# Altium PCB PCB1.PcbDoc
Units mil, origin at the board's own origin, x right, y up, seen from the top; angles counter-clockwise.
Board outline 4500 x 2600 mil, 2 copper layers (Top Layer, Bottom Layer), stack 60.4 mil thick; 4 components, 2 nets, 8 pads, 0 vias.
Unrouted connection lines stored in the file: 6.
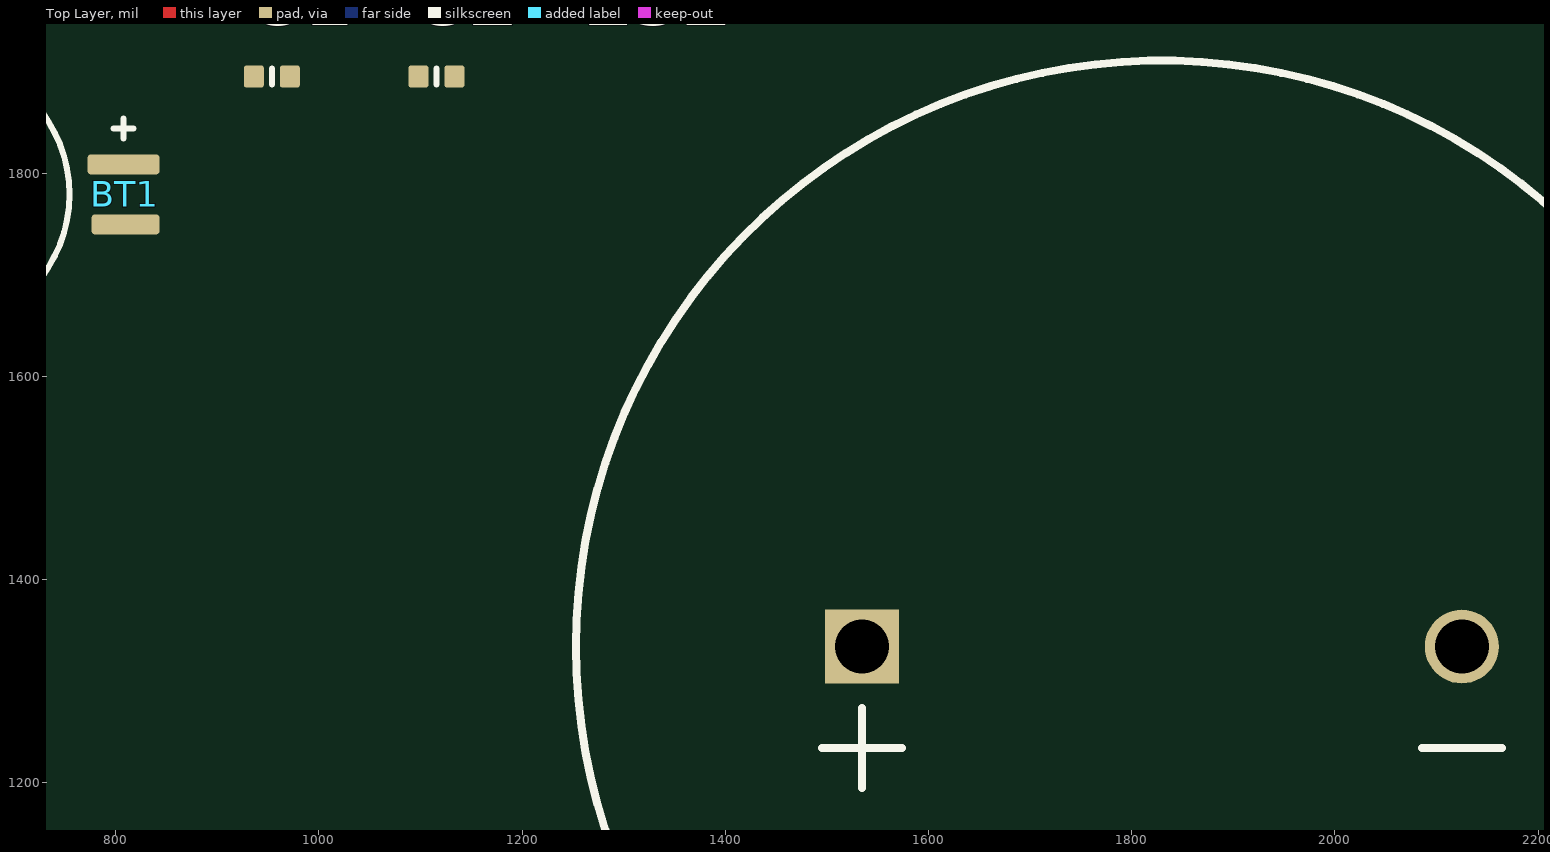
[diagram p0: Top Layer view]
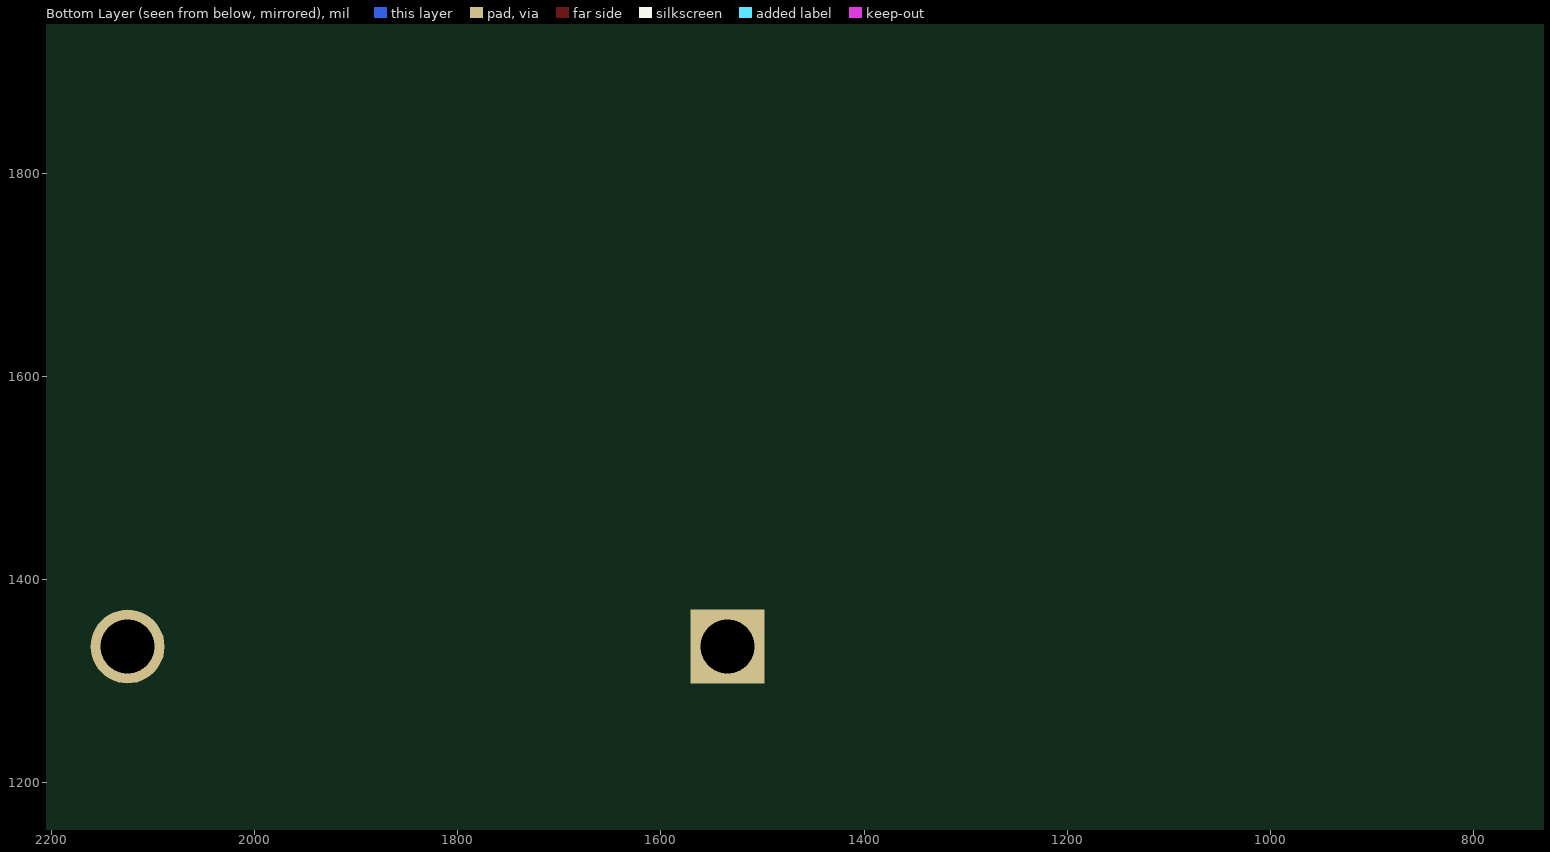
[diagram p1: Bottom Layer view, seen from below]

## Layer stack, top to bottom
Top Solder: solder mask 0.5, Solder Resist, Dk 3.3
Top Layer: signal copper 0.7
Dielectric1: core 59, FR-4, Dk 4.3
Bottom Layer: signal copper 0.7
Bottom Solder: solder mask 0.5, Solder Resist, Dk 3.3

## Board outline
0,0 4500,0 4500,2600 0,2600

## Design rules (kind name [scope] priority, off if disabled: settings)
Clearance [All] p1: gap=10 ignorepadtopadclearanceinfootprint=FALSE
DiffPairsRouting [All] p1: maxlimit=10 minlimit=10 mostfreqgap=10 toplayer_minwidth=10 toplayer_maxwidth=10 toplayer_prefwidth=10 bottomlayer_minwidth=10 bottomlayer_maxwidth=10 bottomlayer_prefwidth=10 maxuncoupledlength=500
HoleSize [All] p1: absolutevalues=TRUE maxlimit=300 minlimit=10 maxpercent=80.000 minpercent=20.000
MinimumAnnularRing [All] p1: minimumring=10
PasteMaskExpansion [All] p1: expansion=10
PlaneClearance [All] p1: clearance=15
PlaneConnect [All] p1: pad.planeconnectstyle=Relief pad.reliefexpansion=20 pad.reliefentries=4 pad.reliefconductorwidth=10 pad.reliefairgap=10 via.planeconnectstyle=Direct via.reliefexpansion=20 via.reliefentries=4 via.reliefconductorwidth=10 via.reliefairgap=10
PolygonConnect [All] p1: thpad.connectstyle=Relief thpad.reliefconductorwidth=10 thpad.reliefentries=4 thpad.polygonreliefangle="90 Angle" thpad.airgapwidth=10 smdpad.connectstyle=Relief smdpad.reliefconductorwidth=10 smdpad.reliefentries=4 smdpad.polygonreliefangle="90 Angle" smdpad.airgapwidth=10 via.connectstyle=Direct via.reliefconductorwidth=10 via.reliefentries=4 via.polygonreliefangle="90 Angle" via.airgapwidth=10
RoomDefinition Sheet1 [InComponentClass('Sheet1')] p1: confinementstyle=ConfineIn formatcopy=TRUE lockcomponents=FALSE outline 478.72,747 2416.72,747 2416.72,2021 478.72,2021
RoutingVias [All] p1: holewidth=10 width=20 viastyle="Through Hole" minholewidth=10 minwidth=20 maxholewidth=10 maxwidth=20
SMDNeckDown [All] p1: percent=100.000
SilkToSolderMaskClearance SilkscreenOverComponentPads [IsPad] p1: minsilkscreentomaskgap=10 clearancetoexposedcopper=TRUE
SolderMaskExpansion [All] p1: expansion=10 istentingtop=FALSE
Width [All] p1: maxlimit=10 minlimit=10 preferedwidth=10
24 further rules are at their usual default settings.

## Components (designator, comment, footprint, x,y, rotation, side; value= is the part's Value field where it differs from the comment)
BT1 "MS621FE-FL11E" SEIK-MS621FE-FL11E-2_V 620.72,1779 r0 top
C1 "Capacitor 470nF +/-40% 10V 0402" CAPC0402(1005)60_L 953.72,1895 r0 top value=470nF
C2 "Capacitor 470nF +/-40% 10V 0402" CAPC0402(1005)60_L 1115.72,1895 r0 top value=470nF
LS2 "ADA1898" ADAI-ADA1898 1829.72,1334 r0 top

## Footprints (in the part's own frame and the unit in brackets; to place one, negate y for a bottom-side part, rotate by r counter-clockwise, add the part's x,y. Pads: shape width x height; smd on the part's side, far side on the other; paste and mask are expansions set on the pad)
ADAI-ADA1898 [mm] "THD, 2-Leads, Dia 29.3mm, Pitch 15mm"
  rect 1.85x1.85 hole 1.35: 1(-7.5,0)
  round 1.85 hole 1.35: 2(7.5,0)
  silkscreen extent -14.65,-14.65 14.65,14.65, body extent -14.65,-14.65 14.65,14.65, height 11.95
CAPC0402(1005)60_L [mm] "Chip Capacitor, Body 1.0x0.5mm, Height 0.6mm, IPC High Density"
  rrect25% 0.5x0.55 smd: 1(-0.45,0) 2(0.45,0)
  silkscreen extent 0,-0.2 0,0.2, body extent -0.5,-0.25 0.5,0.25, height 0.6
SEIK-MS621FE-FL11E-2_V [mm] "SMD, 2-Leads, Diameter 6.8mm"
  rrect35% 1.8x0.5 smd: 1(4.75,0.75)
  rrect35% 1.7x0.5 smd: 2(4.8,-0.75)
  silkscreen extent -3.4,-3.4 5,3.4, body extent -3.4,-3.4 4.35,3.4, height 2.7

## Part data
BT1: library part CMP-00029-00000-1, "MS Lihium Rechargeable Battery, 3 V, -20 to 60 degC, Tray", Mounting Technology=WithLeads, Pins=2, RoHS Compliant=NotApplicable
C1 C2: library part CMP-001-00060-2, "Chip Capacitor, 470nF +/-40%, 10V, 0402, Thickness 0.6 mm", Case/Package=0805, Max Operating Temperature=85°C, Min Operating Temperature=-55°C, Tolerance=20%, Voltage Rating=10V, Mounting Technology=SMT, Pins=2
LS2: library part CMP-00027-00000-1, "Mini Speaker, 8 Ohm, 0.2 Wmax, -10 to 40 degC, 2-Pin THD, RoHS", Manufacturer="Adafruit Industries", Package Description="2-Pin Through Hole Device, Dia 29.3 mm, Pitch 15 mm", Case/Package=ADA1898, Datasheet URL=https://cdn-shop.adafruit.com/datasheets/P1898.pdf, Datasheet Version=Mar-14, Manufacturer URL=https://www.adafruit.com/, Mounting Technology=TH, Package Reference=ADA1898, RoHS Compliant=Unknown

## Nets (pads, with @x,y where several pads share a name; then routed paths per layer and width w, separated by ;. In a path a pad name is that pad's centre, name@x,y a point inside that pad or via, vN(x,y) a via of type N, cw(c..) or ccw(c..) an arc to the next point about the centre after c; other vN are vias at no path point)
NetBT1_1: BT1.1 C1.1 C2.2 LS2.1
NetBT1_2: BT1.2 C1.2 C2.1 LS2.2